# Altium PCB PCB1.PcbDoc
Units mm, origin at the board's own origin, x right, y up, seen from the top; angles counter-clockwise.
Board outline 40.25 x 35.46 mm, 2 copper layers (Top Layer, Bottom Layer); 48 components, 38 nets, 188 pads, 49 vias.
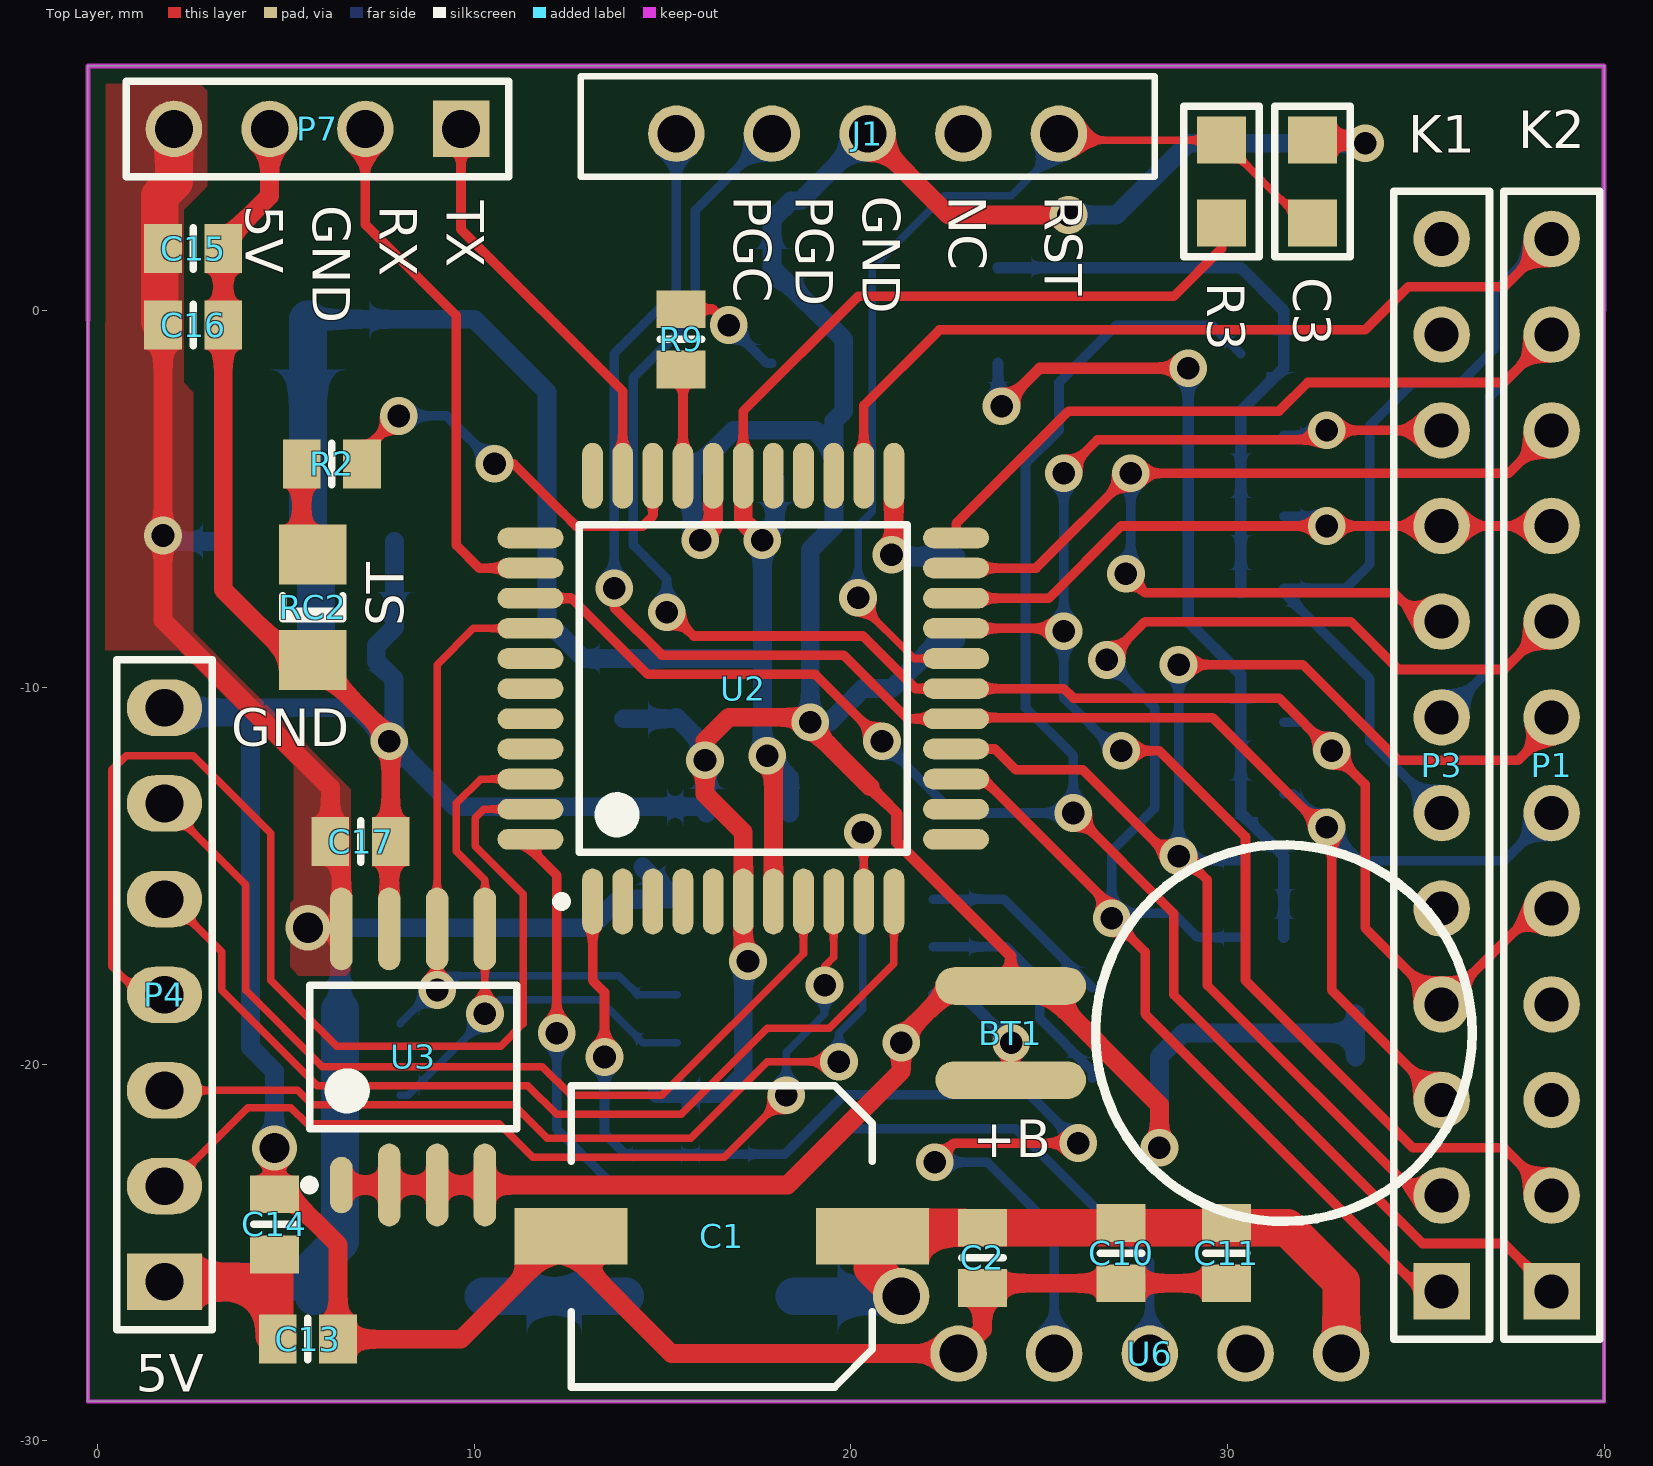
[diagram p0: Top Layer view]
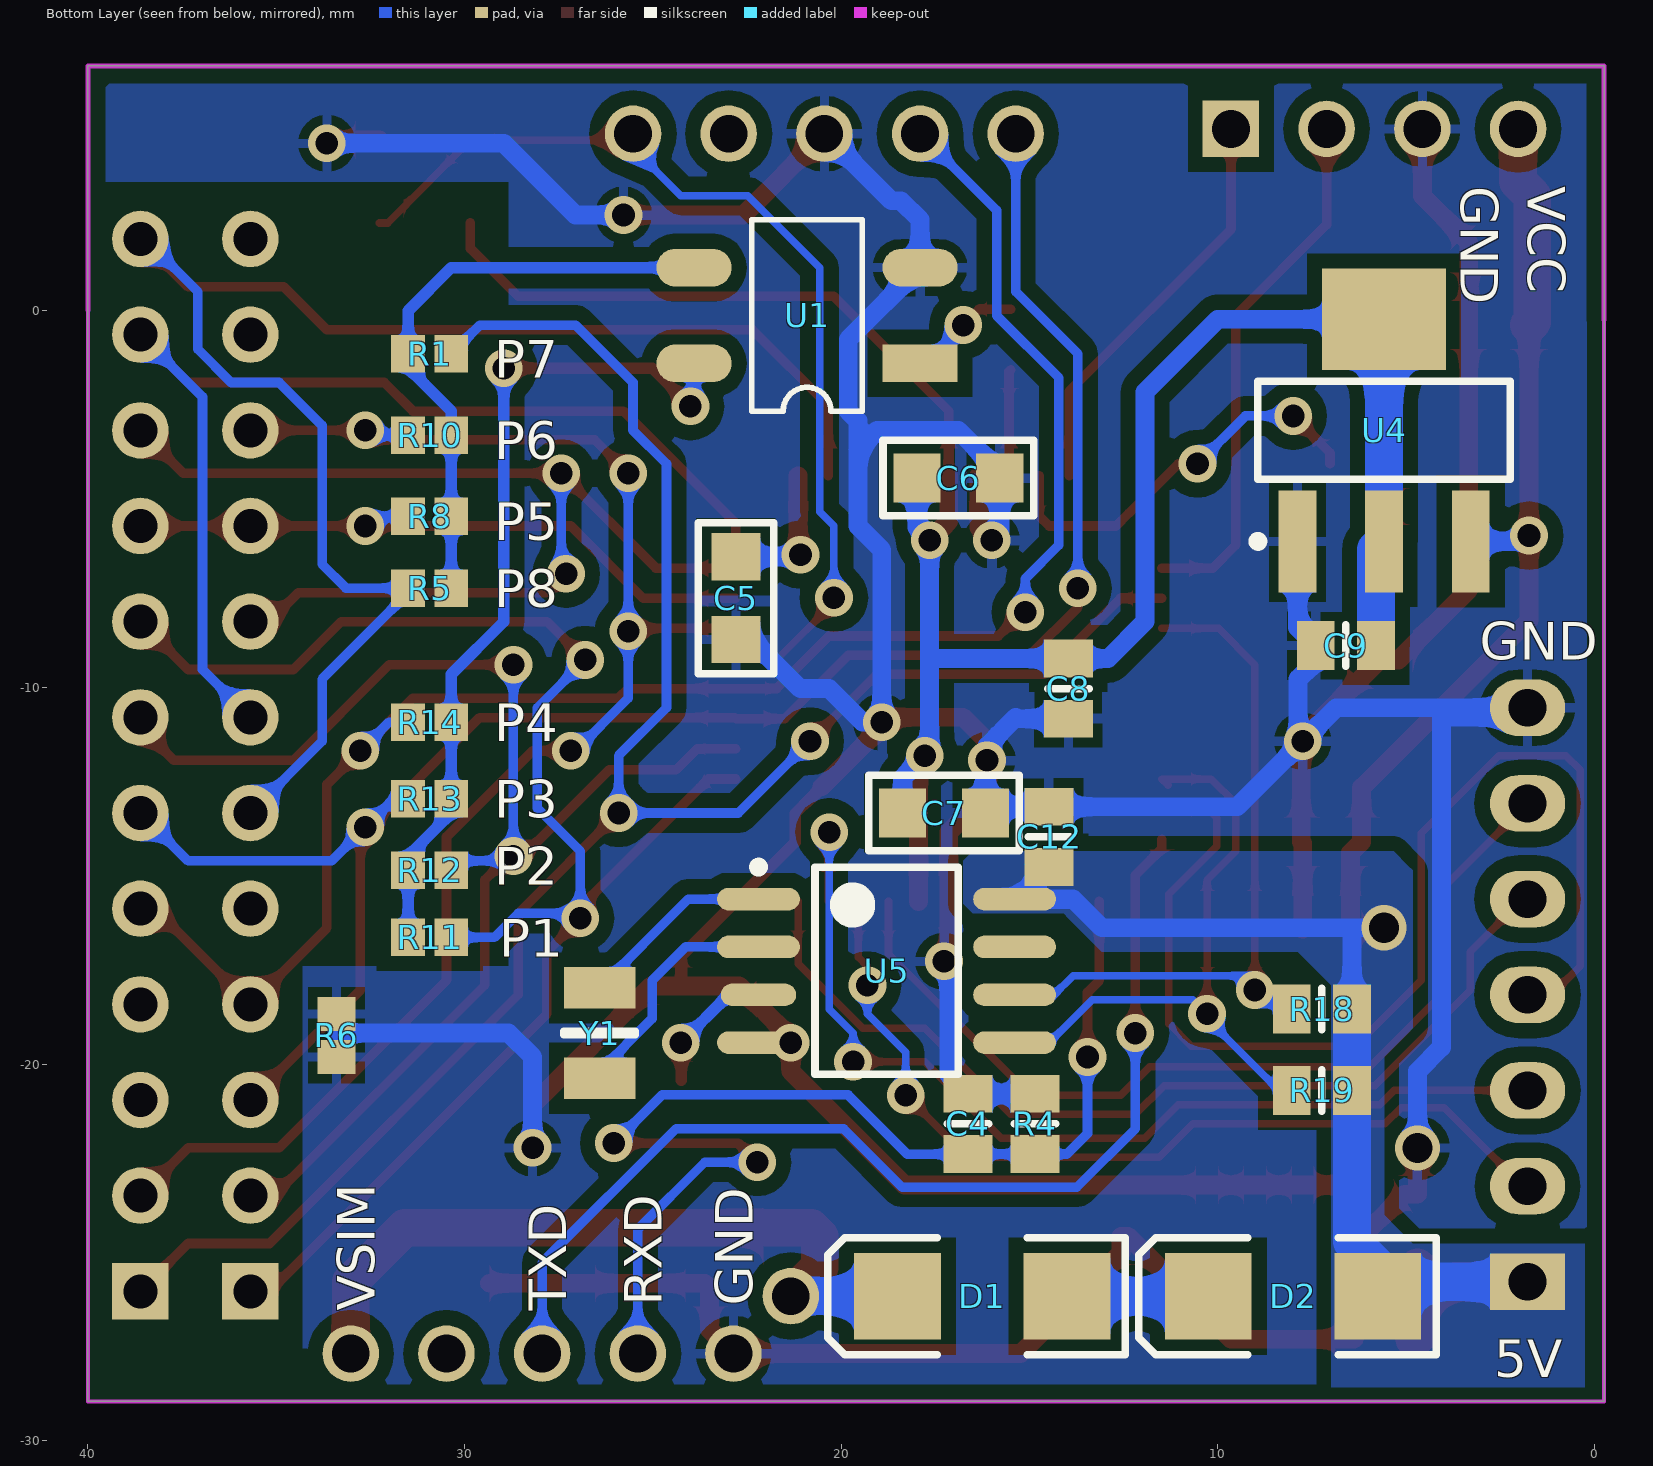
[diagram p1: Bottom Layer view, seen from below]

## Layer stack, top to bottom
Top Solder: solder mask 0.0102, Solder Resist, Dk 3.5
Top Layer: signal copper 0.0356
Dielectric1: dielectric 0.32, FR-4, Dk 4.8
Bottom Layer: signal copper 0.0356
Bottom Solder: solder mask 0.0102, Solder Resist, Dk 3.5

## Board outline
-0.254,-28.956 40,-28.956 40,6.5 -0.254,6.5

## Design rules (kind name [scope] priority, off if disabled: settings)
Clearance [All] p1: gap=0.254
MinimumSolderMaskSliver [All] p1 off: minsoldermaskwidth=0.254
PlaneConnect [All] p1: planeconnectstyle=Direct reliefexpansion=0.508 reliefentries=4 reliefconductorwidth=0.254 reliefairgap=0.254
PolygonConnect [All] p1: connectstyle=Direct reliefconductorwidth=0.254 reliefentries=4 polygonreliefangle="90 Angle" airgapwidth=0.254
RoutingVias [All] p1: holewidth=0.711 width=1.27 viastyle="Through Hole" minholewidth=0.2 minwidth=0.3 maxholewidth=2 maxwidth=3
SilkToSilkClearance [All] p1 off: silktosilkclearance=0.254
SilkToSolderMaskClearance SilkscreenOverComponentPads [IsPad] p1 off: minsilkscreentomaskgap=0.254 clearancetoexposedcopper=TRUE
SolderMaskExpansion [All] p1: expansion=0.102
Width [All] p1: maxlimit=1 minlimit=0.2 preferedwidth=0.254
26 further rules are at their usual default settings.

## Components (designator, comment, footprint, x,y, rotation, side; value= is the part's Value field where it differs from the comment)
BT1 "ML-920S/DN" ML-920S/DN 31.496,-19.177 r180 top
C1 "EEE-FT1A102AP" CAP8x8 12.573,-20.574 r0 top
C2 "LMK212F106ZG-T" RESC2012L 23.495,-25.146 r270 top
C3 "Cap Semi" CAPC2013X05N 32.258,3.429 r270 top
C4 "LMK212F106ZG-T" RESC2012L 16.637,-21.59 r90 bottom
C5 "Cap Semi" CAPC2013X05N 22.795,-7.633 r90 bottom
C6 "Cap Semi" CAPC2013X05N 16.891,-4.445 r0 bottom
C7 "Cap Semi" CAPC2013X05N 17.272,-13.335 r0 bottom
C8 "CL21F104ZBCNNNC" RESC2012L 13.97,-10.033 r270 bottom
C9 "LMK212F106ZG-T" RESC2012L 6.604,-8.89 r0 bottom
C10 "LMK212F106ZG-T" RESC2012L 27.178,-25.019 r270 top
C11 "LMK212F106ZG-T" RESC2012L 29.972,-25.019 r270 top
C12 "LMK212F106ZG-T" RESC2012L 14.478,-13.97 r90 bottom
C13 "CL21F104ZBCNNNC" RESC2012L 5.588,-27.305 r0 top
C14 "LMK212F106ZG-T" RESC2012L 4.699,-24.257 r90 top
C15 "CL21F104ZBCNNNC" RESC2012L 2.54,1.651 r0 top
C16 "LMK212F106ZG-T" RESC2012L 2.54,-0.381 r0 top
C17 "LMK212F106ZG-T" RESC2012L 6.985,-14.097 r0 top
D1 "SS34" SMB 16.256,-26.162 r0 bottom
D2 "SS34" SMB 8.001,-26.162 r0 bottom
J1 "87224-5" CON5 20.447,4.699 r0 top
P1 "Header 12" HDR1X12 38.608,-26.035 r90 top
P3 "Header 12" HDR1X12 35.687,-26.035 r90 top
P4 "Header 7" HDR1X7 1.778,-25.781 r90 top
P7 "Header 4" HDR1X4 9.652,4.826 r180 top
R1 "ERJ-6GEYJ331V" JUM1 30.861,-1.143 r0 bottom
R2 "ERJ-6GEYJ102V" RESC2012L 6.223,-4.064 r180 top
R3 "Res3" RESC2013X05N 29.845,3.429 r90 top
R4 "ERJ-6GEYJ102V" RESC2012L 14.859,-21.59 r90 bottom
R5 "ERJ-6GEYJ331V" JUM1 30.988,-7.366 r180 bottom
R6 "ERJ-6GEYJ331V" JUM1 33.401,-19.304 r90 bottom
R8 "ERJ-6GEYJ331V" JUM1 30.988,-5.461 r180 bottom
R9 "ERJ-6GEYJ331V" RESC2012L 15.494,-0.762 r270 top
R10 "ERJ-6GEYJ331V" JUM1 30.988,-3.302 r180 bottom
R11 "ERJ-6GEYJ331V" JUM1 30.861,-16.637 r0 bottom
R12 "ERJ-6GEYJ331V" JUM1 30.861,-14.859 r0 bottom
R13 "ERJ-6GEYJ331V" JUM1 30.988,-12.954 r180 bottom
R14 "ERJ-6GEYJ331V" JUM1 30.988,-10.922 r180 bottom
R18 "ERJ-6GEYJ331V" RESC2012L 7.239,-18.542 r180 bottom
R19 "ERJ-6GEYJ331V" RESC2012L 7.239,-20.701 r180 bottom
RC2 "LNJ911W8BRU" CD3216-1206 5.715,-7.874 r270 top
U1 "AQY282SX" SOP4 17.907,-1.397 r0 bottom
U2 "PIC18F46J11T-I/PT" TQFP-PT44_N 17.145,-10.033 r90 top locked
U3 "24AA1025T-I/SM" SOIJ-SM8_N#1 8.382,-19.812 r90 top
U4 "AMS1117" SOT223-4M 5.588,-3.175 r90 bottom
U5 "DS1307" SOIJ-SM8_N#2 18.796,-17.526 r0 bottom
U6 "SIM800L" SIM800L 22.86,-27.686 r90 top locked
Y1 "ECS-110-S-5P" ABS07 26.416,-19.177 r270 bottom

## Footprints (in the part's own frame and the unit in brackets; to place one, negate y for a bottom-side part, rotate by r counter-clockwise, add the part's x,y. Pads: shape width x height; smd on the part's side, far side on the other; paste and mask are expansions set on the pad)
ABS07 [mm] "MELF Resistor, 2-Leads, Body 3.2x1.5mm, IPC Medium Density"
  rect 1.1x1.9 smd: 1(-1.2,0) 2(1.2,0)
  silkscreen extent -0.05,-0.95 0.05,0.95, body extent -1.65,-0.8 1.65,0.8, height 1.6
CAP8x8 [mm]
  rect 3x1.5 smd: 1(8,-4) 2(0,-4)
  silkscreen extent 0,-8 8,0
CAPC2013X05N [mm] "Chip Capacitor, 2-Leads, Body 2,0x1,3mm, IPC Medium Density"
  rect 1.25x1.3 smd: 1(-1.1,0) 2(1.1,0)
  silkscreen extent -2,-1 2,1, body extent -1.05,-0.67 1.05,0.68, height 0.5
CD3216-1206 [mm] "Chip Diode; Body 3.2 x 1.6 mm (LxW typ)"
  rect 1.6x1.8 smd: 1(-1.4,0) 2(1.4,0)
  silkscreen extent -0.3,-0.8 0.3,0.8
CON5 [mm]
  round 1.5 hole 1: 1(5.08,0) 2(2.54,0) 3(0,0) 4(-2.54,0) 5(-5.08,0)
  silkscreen extent -7.62,-1.14 7.62,1.52
HDR1X4 [mm] "Connector; Header; 4 Position"
  rect 1.5x1.5 hole 1: 1(0,0)
  round 1.5 hole 1: 2(2.54,0) 3(5.08,0) 4(7.62,0)
  silkscreen extent -1.27,-1.27 8.89,1.27
HDR1X7 [mm] "Connector; Header; 7 Position"
  rect 1.5x2 hole 1: 1(0,0)
  oval 1.5x2 hole 1: 2(2.54,0) 3(5.08,0) 4(7.62,0) 5(10.16,0) 6(12.7,0) 7(15.24,0)
  silkscreen extent -1.27,-1.27 16.51,1.27
HDR1X12 [mm] "Connector; Header; 12 Position"
  rect 1.5x1.5 hole 0.9: 1(0,0)
  round 1.5 hole 0.9: 2(2.54,0) 3(5.08,0) 4(7.62,0) 5(10.16,0) 6(12.7,0) 7(15.24,0) 8(17.78,0) 9(20.32,0) 10(22.86,0) 11(25.4,0) 12(27.94,0)
  silkscreen extent -1.27,-1.27 29.21,1.27
JUM1 [mm] "Chip Resistor, Body 1.6x0.8mm, IPC Medium Density"
  rect 0.9x1 smd: 1(-0.508,0) 2(0.635,0)
  body extent -0.85,-0.48 0.85,0.48, height 0.6
ML-920S/DN [mm]
  oval 4x1 smd mask+0.02: 1(7.25,1.25) 2(7.25,-1.25)
  silkscreen extent -5,-5 5,5
RESC2012L [mm] "Chip Resistor, Body 2.0x1.3mm, IPC High Density"
  rect 1x1.3 smd: 1(-0.8,0) 2(0.8,0)
  silkscreen extent 0,-0.55 0,0.55, body extent -1.07,-0.7 1.07,0.7, height 0.65
RESC2013X05N [mm] "Chip Resistor, 2-Leads, Body 2,0x1,3mm, IPC Medium Density"
  rect 1.25x1.3 smd: 1(1.1,0) 2(-1.1,0)
  silkscreen extent -2,-1 2,1, body extent -1.05,-0.68 1.05,0.67, height 0.5
SIM800L [mm]
  round 1.5 hole 1 mask+0.01: 1(0,-10.16) 2(0,-7.62) 3(0,-5.08) 4(0,-2.54) 5(0,0)
SMB [mm] "DO-214-AA/SMB; 2 C-Bend Leads; Body 5.3 x 3.6 mm, inc. leads (LxW)"
  rect 2.3x2.3 smd: 1(-2.25,0) 2(2.25,0)
  silkscreen extent -3.8,-1.55 4.1,1.55
SOIJ-SM8_N#1 [mm] "SOP, 8-Leads, Body 5.2x5.2mm, Pitch 1.27mm, IPC Medium Density"
  oval 1.5x0.6 smd: 1(-3.4,1.905)
  oval 2.2x0.6 smd: 2(-3.4,0.635) 3(-3.4,-0.635) 4(-3.4,-1.905) 5(3.4,-1.905) 6(3.4,-0.635) 7(3.4,0.635) 8(3.4,1.905)
  silkscreen extent -3.52,-2.75 1.9,2.88, body extent -2.73,-2.75 2.73,2.75, height 2.04
SOIJ-SM8_N#2 [mm] "SOP, 8-Leads, Body 5.2x5.2mm, Pitch 1.27mm, IPC Medium Density"
  oval 2.2x0.6 smd: 1(3.4,-1.905) 2(3.4,-0.635) 4(3.4,1.905) 5(-3.4,1.905) 6(-3.4,0.635) 7(-3.4,-0.635) 8(-3.4,-1.905)
  oval 2x0.6 smd: 3(3.4,0.635)
  silkscreen extent -1.9,-2.88 3.52,2.75, body extent -2.75,-2.73 2.75,2.73, height 2.04
SOP4 [mm]
  rect 2x1 smd: 1(0,0)
  oval 2x1 smd: 2(0,-2.54) 3(6,-2.54) 4(6,0)
  silkscreen extent 1.53,-3.81 4.47,1.27
SOT223-4M [mm] "SOT223, 4-Leads, Body 6.5x3.5mm, Pitch 2.3mm, Lead Span 7mm, IPC Low Density"
  rect 2.7x1 smd: 1(-2.95,2.3) 2(-2.95,0) 3(-2.95,-2.3)
  rect 2.7x3.3 smd: 4(2.95,0)
  silkscreen extent -3.07,-3.35 1.3,3.48, body extent -1.85,-3.35 1.85,3.35, height 1.8
TQFP-PT44_N [mm] "Thin QFP, 44-Leads, Body 10x10mm, Pitch 0.8mm, IPC Medium Density"
  oval 1.75x0.55 smd: 1(-5.65,4) 2(-5.65,3.2) 3(-5.65,2.4) 4(-5.65,1.6) 5(-5.65,0.8) 6(-5.65,0) 7(-5.65,-0.8) 8(-5.65,-1.6) 9(-5.65,-2.4) 10(-5.65,-3.2) 11(-5.65,-4) 23(5.65,-4) 24(5.65,-3.2) 25(5.65,-2.4) 26(5.65,-1.6) 27(5.65,-0.8) 28(5.65,0) 29(5.65,0.8) 30(5.65,1.6) 31(5.65,2.4) 32(5.65,3.2) 33(5.65,4)
  oval 0.55x1.75 smd: 12(-4,-5.65) 13(-3.2,-5.65) 14(-2.4,-5.65) 15(-1.6,-5.65) 16(-0.8,-5.65) 17(0,-5.65) 18(0.8,-5.65) 19(1.6,-5.65) 20(2.4,-5.65) 21(3.2,-5.65) 22(4,-5.65) 34(4,5.65) 35(3.2,5.65) 36(2.4,5.65) 37(1.6,5.65) 38(0.8,5.65) 39(0,5.65) 40(-0.8,5.65) 41(-1.6,5.65) 42(-2.4,5.65) 43(-3.2,5.65) 44(-4,5.65)
  silkscreen extent -5.77,-4.35 4.35,4.95, body extent -5,-5 5,5, height 1.2

## Part data
BT1: library part Battery, "Multicell Battery"
C1: library part "Cap Pol1", "CAP ALUM 1000UF 10V 20% SMD"
C2 C4 C9 C10 C11 C12 C14 C16 C17: library part Cap, "CAP CER 10UF 10V Y5V 0805"
C3 C5 C6 C7: "Capacitor (Semiconductor SIM Model)"
C8 C13 C15: library part Cap, "CAP CER 0.1UF 50V Y5V 0805"
D1 D2: library part "D Schottky SS34", "DIODE SCHOTTKY 40V 3A SMC"
J1: library part CON5, "CONN HEADER VERT .100 5POS 15AU"
P1 P3: "Header, 12-Pin"
P4: "Header, 7-Pin"
P7: "Header, 4-Pin"
R1 R5 R6 R8 R9 R10 R11 R12 R13 R14 R18 R19: library part Res3, "RES 330 OHM 1/8W 5% 0805 SMD"
R2 R4: library part Res3, "RES 1K OHM 1/8W 5% 0805 SMD"
R3: "Resistor"
RC2: library part LEDRED1206, "LED BLUE THRU BOARD 1206"
U1: "RELAY OPTO 60VAC/DC 500MA 4-SOP"
U2: "Low Power, High Performance Microcontroller with nanoWatt XLP Technology, 44-pin TQFP, Industrial Temperature, Tape and Reel"
U3: "1 Mbit, 400kHz, 1.7V, I2C Serial EEPROM, 8-Pin SOIC 208mil, Industrial Temperature, Tape and Reel"
U4: "Adjustable Precision Shunt Regulator"
Y1: "Crystal Oscillator"

## Free pads (board coordinates)
  round 1.5 hole 1 mask+0.01: 0(21.336,-26.162)

## Via types
v1: diameter 1, hole 0.6, Top Layer to Bottom Layer, 47 vias
v2: diameter 1.2, hole 0.8, Top Layer to Bottom Layer, 2 vias

## Nets (pads, with @x,y where several pads share a name; then routed paths per layer and width w, separated by ;. In a path a pad name is that pad's centre, name@x,y a point inside that pad or via, vN(x,y) a via of type N, cw(c..) or ccw(c..) an arc to the next point about the centre after c; other vN are vias at no path point)
C0: P1.12 P3.6 R5.1 U2.24 | length 43.5
  Top Layer w0.254: U2.24 20.345,-2.515 22.352,-0.508 33.655,-0.508 34.798,0.635 37.338,0.635 P1.12
  Bottom Layer w0.254: R5.1@31.496,-7.493 33.782,-9.779 33.782,-11.43 P3.6 ; R5.1 33.147,-7.366 33.782,-6.731 33.782,-3.048 34.925,-1.905 36.195,-1.905 37.084,-1.016 37.084,0.508 38.481,1.905 P1.12
C1: P1.11 P3.7 U2.22 | length 29.6
  Top Layer w0.254: U2.22 22.795,-5.653 25.781,-2.667 31.369,-2.667 32.131,-1.905 37.338,-1.905 P1.11
  Bottom Layer w0.254: P3.7 36.957,-9.525 36.957,-2.286 P1.11
C2: P1.10 P3.8 U2.21 | length 29
  Top Layer w0.254: U2.21 24.917,-6.833 v1(27.432,-4.318) 37.465,-4.318 P1.10 ; v1(27.305,-6.985) 27.813,-7.493 34.417,-7.493 35.179,-8.255 P3.8
  Bottom Layer w0.254: v1(27.305,-6.985) 27.432,-6.858 v1(27.432,-4.318)
C3: P1.9 P3.9 R8.1 U2.20 | length 17.9
  Top Layer w0.254: U2.20 25.26,-7.633 27.178,-5.715 v1(32.639,-5.715) P3.9 P1.9
  Bottom Layer w0.254: R8.1 32.385,-5.461 v1(32.639,-5.715)
C4: P1.2 P3.10 R10.1 U2.19 | length 41.2
  Top Layer w0.254: U2.19 25.578,-8.433 v1(25.654,-8.509) ; v1(25.654,-4.318) 26.543,-3.429 32.385,-3.429 v1(32.639,-3.175) P3.10 ; v1(27.178,-11.684) 28.194,-11.684 30.48,-13.97 30.48,-17.78 34.925,-22.225 37.338,-22.225 P1.2
  Bottom Layer w0.254: v1(25.654,-4.318) v1(25.654,-8.509) 25.654,-10.287 27.051,-11.684 v1(27.178,-11.684) ; R10.1 32.512,-3.302 v1(32.639,-3.175)
C5: P1.1 R1.1 U2.36 | length 54.1
  Top Layer w0.254: U2.36 12.586,-7.633 14.605,-9.652 19.05,-9.652 v1(20.828,-11.43) ; v1(25.908,-13.335) 28.575,-16.002 28.575,-18.161 35.179,-24.765 37.338,-24.765 P1.1
  Bottom Layer w0.254: v1(20.828,-11.43) 22.733,-13.335 v1(25.908,-13.335) 25.908,-11.811 24.638,-10.541 24.638,-4.064 25.527,-3.175 25.527,-2.667 25.527,-1.905 27.051,-0.381 29.591,-0.381 R1.1
CLK1: P4.3 U2.10 | length 27.5
  Top Layer w0.2: P4.3 5.32,-20.701 5.701,-21.082 11.049,-21.082 11.938,-21.971 15.748,-21.971 17.78,-19.939 v1(19.685,-19.939) ; v1(20.32,-13.843) 20.345,-13.868 U2.10
  Bottom Layer w0.2: v1(19.685,-19.939) 19.685,-19.177 20.32,-18.542 v1(20.32,-13.843)
CLK2: P4.5 U2.11 | length 25.6
  Top Layer w0.2: P4.5 1.905,-15.621 3.302,-17.018 3.302,-18.041 5.835,-20.574 11.43,-20.574 12.192,-21.336 15.494,-21.336 17.78,-19.05 19.431,-19.05 21.145,-17.336 U2.11
CX: R1.2 R5.2 R8.2 R10.2 U1.3 | length 16
  Bottom Layer w0.3: U1.3 30.353,1.143 31.496,0 R1.2 31.496,-1.524 30.353,-2.667 R10.2 R5.2@30.353,-7.493
DAT1: P4.2 U2.9 | length 24.3
  Top Layer w0.2: P4.2 1.905,-23.241 3.991,-21.155 5.132,-21.155 5.567,-21.59 10.668,-21.59 11.557,-22.479 16.637,-22.479 v1(18.288,-20.828) ; v1(19.304,-17.907) 19.304,-17.399 19.545,-17.158 U2.9
  Bottom Layer w0.2: v1(18.288,-20.828) 18.288,-19.685 19.304,-18.669 v1(19.304,-17.907)
DAT2: P4.4 U2.43 | length 31.3
  Top Layer w0.2: P4.4 1.143,-18.161 0.381,-17.399 0.381,-12.192 0.762,-11.811 2.54,-11.811 4.607,-13.878 4.607,-17.78 6.35,-19.523 10.703,-19.523 11.303,-18.923 11.303,-15.487 10.033,-14.217 10.033,-13.462 10.262,-13.233 U2.43
GND: BT1.2 C1.2 C2.2 C3.1 C4.2 C5.1 C6.1 C7.1 C8.2 C9.2 C10.2 C11.2 C12.2 C13.2 C14.2 C15.2 C16.2 C17.2 J1.3 P4.7 P7.3 R4.2 R6.1 R6.2 RC2.2 U1.2 U2.6 U2.29 U3.1 U3.2 U3.3 U3.4 U3.7 U4.1 U5.4 U6.5 | length 203.9
  Top Layer w0.3: 20.511,-12.636 21.224,-13.35 21.224,-14.112 24.246,-17.134 BT1.2
  Top Layer w0.5: P7.3 4.572,3.048 3.34,1.816 C15.2 C16.2 3.34,-7.404 5.21,-9.274 RC2.2 7.747,-11.306 v1(7.747,-11.43) 7.785,-11.468 C17.2 7.747,-14.135 U3.7 ; v2(4.699,-22.225) C14.2 5.042,-23.457 6.388,-24.803 C13.2 9.652,-27.305 12.383,-24.574 C1.2 12.573,-25.019 15.24,-27.686 U6.5 23.495,-27.051 C2.2 23.622,-25.819 C11.2@29.337,-25.819 ; U3.1 U3.2 U3.3 U3.4 18.317,-23.212 21.336,-20.193 21.336,-19.304 22.713,-17.927 BT1.2 25.039,-17.927 28.194,-21.082 v1(28.194,-22.225) ; v1(16.002,-6.096) 16.345,-5.753 U2.29 ; v1(17.272,-17.272) 17.145,-17.145 U2.6 17.145,-13.843 16.129,-12.827 v1(16.129,-11.938) 16.129,-11.43 16.764,-10.795 18.669,-10.795 20.511,-12.636 ; J1.3 22.606,2.54 v1(25.781,2.54) ; C3.1 33.571,4.529 v1(33.655,4.445)
  Bottom Layer w0.5: v2(4.699,-22.225) 4.699,-20.193 4.064,-19.558 4.064,-10.795 2.032,-10.795 P4.7 6.858,-10.541 v1(7.747,-11.43) ; U4.1 7.888,-8.406 C9.2 7.404,-9.309 7.874,-9.779 7.874,-11.303 v1(7.747,-11.43) ; C8.2 15.329,-10.833 15.367,-10.795 16.129,-11.557 v1(16.129,-11.938) 16.172,-11.981 C7.1 16.007,-13.17 C12.2 9.487,-13.17 v1(7.747,-11.43) ; R4.2 C4.2 17.145,-20.282 17.145,-17.399 v1(17.272,-17.272) ; v1(16.002,-6.096) 15.791,-5.885 C6.1 15.791,-4.275 16.891,-3.175 19.05,-3.175 19.558,-3.683 ; J1.3 18.669,2.921 18.415,2.921 17.907,2.413 U1.2 19.812,-0.762 19.812,-2.667 19.558,-2.921 19.558,-3.683 ; C5.1 22.382,-8.733 21.082,-10.033 20.32,-10.033 19.431,-10.922 v1(18.923,-10.922) 18.923,-6.35 19.558,-5.715 19.558,-3.683 ; v1(25.781,2.54) 27.051,2.54 28.956,4.445 v1(33.655,4.445) ; v1(28.194,-22.225) 28.194,-19.812 28.829,-19.177 33.401,-19.177 ; R6.1 33.401,-19.177 ; R6.2 33.401,-19.177
  other v1: 21.336,-19.431
LED: R2.1 U2.31 | length 10.8
  Top Layer w0.254: R2.1 7.023,-3.772 v1(8.001,-2.794) ; v1(10.541,-4.064) 11.049,-4.064 12.362,-5.377 12.367,-5.377 12.705,-5.715 14.478,-5.715 14.745,-5.448 U2.31
  Bottom Layer w0.254: v1(8.001,-2.794) 9.271,-2.794 v1(10.541,-4.064)
MCU_RXD0: C4.1 R4.1 U2.1 U6.4 | length 31.5
  Top Layer w0.254: U2.1 13.145,-17.78 13.462,-18.097 v1(13.462,-19.812) ; v1(22.225,-22.606) 22.733,-22.098 v1(26.035,-22.098)
  Bottom Layer w0.254: v1(13.462,-19.812) 13.462,-21.844 14.008,-22.39 R4.1 C4.1 18.25,-22.39 19.82,-20.82 24.757,-20.82 v1(26.035,-22.098) ; v1(22.225,-22.606) 23.622,-22.606 25.4,-24.384 U6.4
MCU_TXD0: U2.44 U6.3 | length 28.9
  Top Layer w0.254: U2.44 11.495,-14.289 12.192,-14.986 v1(12.192,-19.177)
  Bottom Layer w0.254: v1(12.192,-19.177) 12.192,-21.717 13.746,-23.271 18.385,-23.271 19.939,-21.717 24.384,-21.717 27.94,-25.273 U6.3
NetBT1_1: BT1.1 U5.3 | length 3.6
  Top Layer w0.3: BT1.1 24.246,-19.442 v1(24.257,-19.431)
  Bottom Layer w0.3: U5.3 22.987,-18.161 v1(24.257,-19.431)
NetC5_2: C5.2 U2.23 | length 3.9
  Top Layer w0.5: v1(21.082,-6.477) 21.145,-6.414 U2.23
  Bottom Layer w0.5: v1(21.082,-6.477) 21.138,-6.533 C5.2
NetD1_1: D1.1 D2.2 | length 3.8
  Bottom Layer w1: D2.2 D1.1
NetR2_2: R2.2 RC2.1 | length 2.5
  Top Layer w0.5: R2.2 5.423,-6.182 RC2.1
NetR9_1: R9.1 U1.1 | length 3
  Top Layer w0.254: R9.1 16.345,0.038 v1(16.764,-0.381)
  Bottom Layer w0.254: v1(16.764,-0.381) 17.78,-1.397 U1.1
NetU5_1: U5.1 Y1.1 | length 5.2
  Bottom Layer w0.254: U5.1 24.06,-15.621 Y1.1
NetU5_2: U5.2 Y1.2 | length 6.4
  Bottom Layer w0.254: U5.2 24.13,-16.891 25.019,-17.78 25.019,-18.796 26.416,-20.193 Y1.2
PGC: J1.5 P1.6 P3.3 R13.1 U2.16 | length 51.3
  Top Layer w0.254: v1(13.716,-7.366) 13.716,-7.874 14.986,-9.144 19.812,-9.144 21.501,-10.833 U2.16 22.825,-10.803 29.599,-10.803 v1@32.575,-13.779 ; v1@32.766,-13.97 32.766,-18.034 P3.3 ; P1.6@38.608,-13.462 P1.6
  Bottom Layer w0.254: v1(13.716,-7.366) 13.716,-1.143 15.367,0.508 J1.5 ; R13.1@31.496,-12.827 31.75,-12.827 v1(32.639,-13.716) 33.528,-14.605 37.338,-14.605 P1.6
PGD: J1.4 P1.5 P3.4 R14.1 U2.17 | length 47.2
  Top Layer w0.254: v1@15.155,-7.959 15.831,-8.636 20.32,-8.636 21.717,-10.033 U2.17 25.654,-10.033 25.908,-10.287 31.369,-10.287 v1(32.766,-11.684) 33.655,-12.573 33.655,-16.383 P3.4 38.227,-15.875 P1.5
  Bottom Layer w0.254: v1(15.113,-8.001) 15.113,-7.112 14.224,-6.223 14.224,-1.778 15.875,-0.127 15.875,2.667 J1.4 ; R14.1 32.004,-10.922 v1(32.766,-11.684)
PRE: P4.6 U2.8 | length 24.8
  Top Layer w0.2: P4.6 3.937,-15.24 3.937,-18.034 5.969,-20.066 11.811,-20.066 12.573,-20.828 14.986,-20.828 18.745,-17.069 U2.8
R0: P1.8 P3.1 R11.1 U2.14 | length 44.6
  Top Layer w0.254: U2.14 23.523,-12.433 26.924,-15.834 v1(26.924,-16.129) 27.813,-17.018 27.813,-18.669 35.179,-26.035 P3.1 ; v1(26.797,-9.271) 27.813,-8.255 33.274,-8.255 34.544,-9.525 37.338,-9.525 P1.8
  Bottom Layer w0.254: v1(26.797,-9.271) 28.067,-10.541 28.067,-13.208 26.924,-14.351 v1(26.924,-16.129) 27.051,-16.002 28.575,-16.002 29.21,-16.637 R11.1
R1: P1.7 P3.2 R12.1 U2.15 | length 37.8
  Top Layer w0.254: U2.15 23.825,-11.633 24.384,-12.192 26.162,-12.192 28.384,-14.414 28.765,-14.414 29.464,-15.113 29.464,-17.907 35.052,-23.495 P3.2 ; v1(28.702,-9.398) 32.004,-9.398 34.544,-11.938 37.719,-11.938 38.608,-11.049 P1.7
  Bottom Layer w0.254: v1(28.702,-9.398) v1(28.702,-14.478) 28.829,-14.605 R12.1@30.353,-14.605
RLKA: R9.2 U2.30 | length 2.8
  Top Layer w0.254: R9.2 15.545,-1.613 U2.30
RST: C3.2 J1.1 R3.1 U2.18 | length 26.5
  Top Layer w0.2: v1@20.193,-7.747 21.679,-9.233 U2.18 ; J1.1 25.697,4.529 R3.1 32.045,2.329 C3.2
  Bottom Layer w0.2: v1(20.193,-7.62) 20.193,-5.715 20.574,-5.334 20.574,1.143 22.479,3.048 24.257,3.048 25.527,4.318 J1.1
RX: P7.2 U2.35 | length 14.3
  Top Layer w0.254: P7.2 7.112,2.286 9.525,-0.127 9.525,-6.223 10.135,-6.833 U2.35
RXX: R11.2 R12.2 R13.2 R14.2 U1.4 | length 22.6
  Top Layer w0.3: v1(24.003,-2.54) 25.019,-1.524 v1(28.956,-1.524)
  Bottom Layer w0.3: U1.4 23.907,-2.444 v1(24.003,-2.54) ; v1(28.956,-1.524) 28.956,-8.255 30.353,-9.652 R14.2 ; R14.2@30.353,-11.049 R13.2 30.353,-13.338 31.496,-14.481 R12.2 R11.2
SCL: R18.1 U2.37 U3.6 U5.6 | length 19.6
  Top Layer w0.2: v1(9.017,-18.034) U3.6 9.017,-9.398 9.982,-8.433 U2.37
  Bottom Layer w0.2: R18.1@8.039,-18.923 9.309,-17.653 13.843,-17.653 14.351,-18.161 U5.6
SDA: R19.1 U2.42 U3.5 U5.5 | length 17.3
  Top Layer w0.2: v1(10.287,-18.669) U3.5 10.287,-15.113 9.525,-14.351 9.525,-13.081 10.173,-12.433 U2.42 U2.42@11.324,-12.604
  Bottom Layer w0.2: R19.1@8.039,-20.828 8.255,-20.828 10.287,-18.796 v1(10.287,-18.669) 10.668,-18.288 13.335,-18.288 14.478,-19.431 U5.5
SIMRST: U2.38
TX: P7.1 U2.32 | length 11
  Top Layer w0.254: P7.1 9.652,2.159 13.945,-2.134 U2.32
VCC: C12.1 C13.1 C14.1 C15.1 C16.1 C17.1 D2.1 P4.1 P7.4 R18.2 R19.2 U3.8 U4.3 U5.8 | length 56.5
  Top Layer w0.5: C16.1 v1(1.74,-5.969) 1.74,-8.217 6.185,-12.662 C17.1 6.477,-14.389 U3.8 5.49,-16.412 5.519,-16.383 v2(5.588,-16.383)
  Top Layer w1: C16.1 1.651,-0.292 1.651,3.048 2.032,3.429 P7.4 ; P4.1 4.699,-25.781 ; C14.1@4.699,-25.4 4.699,-25.781 ; C13.1 4.699,-27.216 4.699,-25.781
  Bottom Layer w0.5: v1(1.74,-5.969) 1.896,-6.125 U4.3 ; D2.1@5.37,-25.781 D2.1@5.751,-25.4 ; v2(5.588,-16.383) 6.35,-16.383 ; R18.2 6.439,-16.472 6.35,-16.383 ; C12.1 U5.8@15.329,-15.621 ; U5.8 U5.8@15.329,-15.621 ; 6.35,-16.383 13.081,-16.383 13.843,-15.621 U5.8@15.329,-15.621
  Bottom Layer w1: P4.1 D2.1@5.37,-25.781 ; D2.1 5.751,-25.4 6.439,-24.712 R19.2 R18.2
VCC_MCU: C6.2 C7.2 C8.1 C9.1 R3.2 U2.7 U2.28 U4.2 U4.4 | length 60.2
  Top Layer w0.254: U2.28 17.145,-2.667 20.193,0.381 28.575,0.381 29.845,1.651 R3.2
  Top Layer w0.5: U2.28 17.145,-5.588 v1(17.653,-6.096) ; v1(17.78,-11.811) 17.945,-11.976 U2.7
  Bottom Layer w0.5: U4.4 10.004,-0.225 11.938,-2.159 11.938,-8.255 12.916,-9.233 C8.1 17.564,-9.233 17.653,-9.144 ; v1(17.78,-11.811) 18.372,-12.403 C7.2 ; v1@17.907,-11.684 17.653,-11.43 17.653,-9.144 ; C6.2 17.991,-5.758 v1(17.653,-6.096) 17.653,-9.144
  Bottom Layer w1: U4.4 U4.2 5.804,-6.341 C9.1
VSIM: C1.1 C2.1 C10.1 C11.1 D1.2 pad.0 U6.1 | length 19.8
  Top Layer w1: pad.0 20.573,-25.399 C1.1 20.801,-24.346 C2.1 31.585,-24.346 33.02,-25.781 U6.1
  Bottom Layer w1: D1.2 pad.0
pads on no net: J1.2 P1.3 P1.4 P3.5 P3.11 P3.12 U2.2 U2.3 U2.4 U2.5 U2.12 U2.13 U2.25 U2.26 U2.27 U2.33 U2.34 U2.39 U2.40 U2.41 U5.7 U6.2

## Polygon pours and split planes (outlines as drawn)
VCC on Bottom Layer "Bottom Layer-No Net" (solid, pour order 4): 0.635,-24.765 0.254,-24.765 0.254,-28.575 6.985,-28.575 6.985,-26.162 6.985,-21.463 6.985,-17.907 7.874,-17.018 9.144,-17.018 13.081,-17.018 13.97,-16.129 14.097,-16.002 14.732,-16.002 16.51,-16.002 16.764,-15.748 16.764,-15.367 16.764,-14.605 16.51,-14.351 14.605,-14.351 5.334,-14.351 4.953,-14.732 4.826,-14.859 4.826,-15.748 4.826,-19.05 5.461,-19.685 5.588,-19.812 5.588,-20.955 5.588,-24.003 5.207,-24.384 4.826,-24.765 0.254,-24.765
GND on Bottom Layer "Bottom Layer-No Net" (solid, pour order 6): -0.254,6.5 40,6.5 40,-28.956 -0.254,-28.956
VCC on Top Layer "Bottom Layer-No Net" (solid, pour order 8): 2.54,6.096 -0.254,6.096 -0.254,-9.017 2.159,-9.017 2.413,-9.271 5.207,-12.065 5.207,-14.859 5.207,-15.621 4.953,-15.875 4.953,-16.383 4.953,-17.272 5.207,-17.526 5.334,-17.653 6.604,-17.653 6.731,-17.526 6.731,-16.256 6.731,-12.7 3.81,-9.779 2.54,-8.509 2.54,-5.588 2.54,-2.159 2.286,-1.905 2.286,-0.889 2.286,2.667 2.794,3.175 2.921,3.302 2.921,5.588 2.921,5.842 2.667,6.096

## Keep-outs
Keep-Out Layer:
  lines w0.1: -0.254,-0.254 -0.254,-28.956 40,-28.956 40,0
  lines w0.127: -0.254,-0.254 -0.254,6.5 40,6.5 40,0

## Other copper
Bottom Layer:
  pour cut-out: 40,3.429 28.829,3.429 28.829,-17.399 34.29,-17.399 34.29,-28.956 40,-28.956

## Silkscreen, mask and mechanical layers (free items; w line width, h text height)
Top Overlay:
  text "K2" at 37.719,4.318 h1
  text "K1" at 34.798,4.191 h1
  text "PGC" at 16.891,3.048 h1 r270
  text "PGD" at 18.542,3.048 h1 r270
  text "GND" at 20.32,3.048 h1 r270
  text "NC" at 22.606,3.048 h1 r270
  text "RST" at 25.146,3.048 h1 r270
  text "TX" at 9.271,2.921 h1 r270
  text "5V" at 3.937,2.794 h1 r270
  text "GND" at 5.715,2.794 h1 r270
  text "RX" at 7.493,2.794 h1 r270
  text "ST" at 8.128,-8.382 h1 r90
  text "GND" at 3.556,-11.557 h1
  text "+B" at 23.241,-22.479 h1
  text "5V" at 1.016,-28.702 h1
Bottom Overlay:
  text "VCC" at 1.778,3.302 h1 r90
  text "GND" at 3.556,3.302 h1 r90
  text "P7" at 29.21,-1.778 h1
  text "P6" at 29.21,-3.937 h1
  text "P5" at 29.21,-6.096 h1
  text "P8" at 29.21,-7.874 h1
  text "GND" at 3.048,-9.271 h1
  text "P4" at 29.21,-11.43 h1
  text "P3" at 29.21,-13.462 h1
  text "P2" at 29.21,-15.24 h1
  text "P1" at 29.083,-17.145 h1
  text "GND" at 22.352,-26.416 h1 r270
  text "RXD" at 24.765,-26.416 h1 r270
  text "TXD" at 27.305,-26.543 h1 r270
  text "VSIM" at 32.385,-26.543 h1 r270
  text "5V" at 2.667,-28.321 h1
Mechanical 13:
  lines w0.1: 0,0 40,0